# Altium PCB ZYNQ_Motherboard_final.PcbDoc (part 1 of 2)
Units mm, origin at the board's own origin, x right, y up, seen from the top; angles counter-clockwise.
Board outline 100.01 x 120 mm, 4 copper layers (Top Layer, GND, Signal03, Bottom Layer), stack 0.778 mm thick; 115 components, 152 nets, 669 pads, 267 vias.
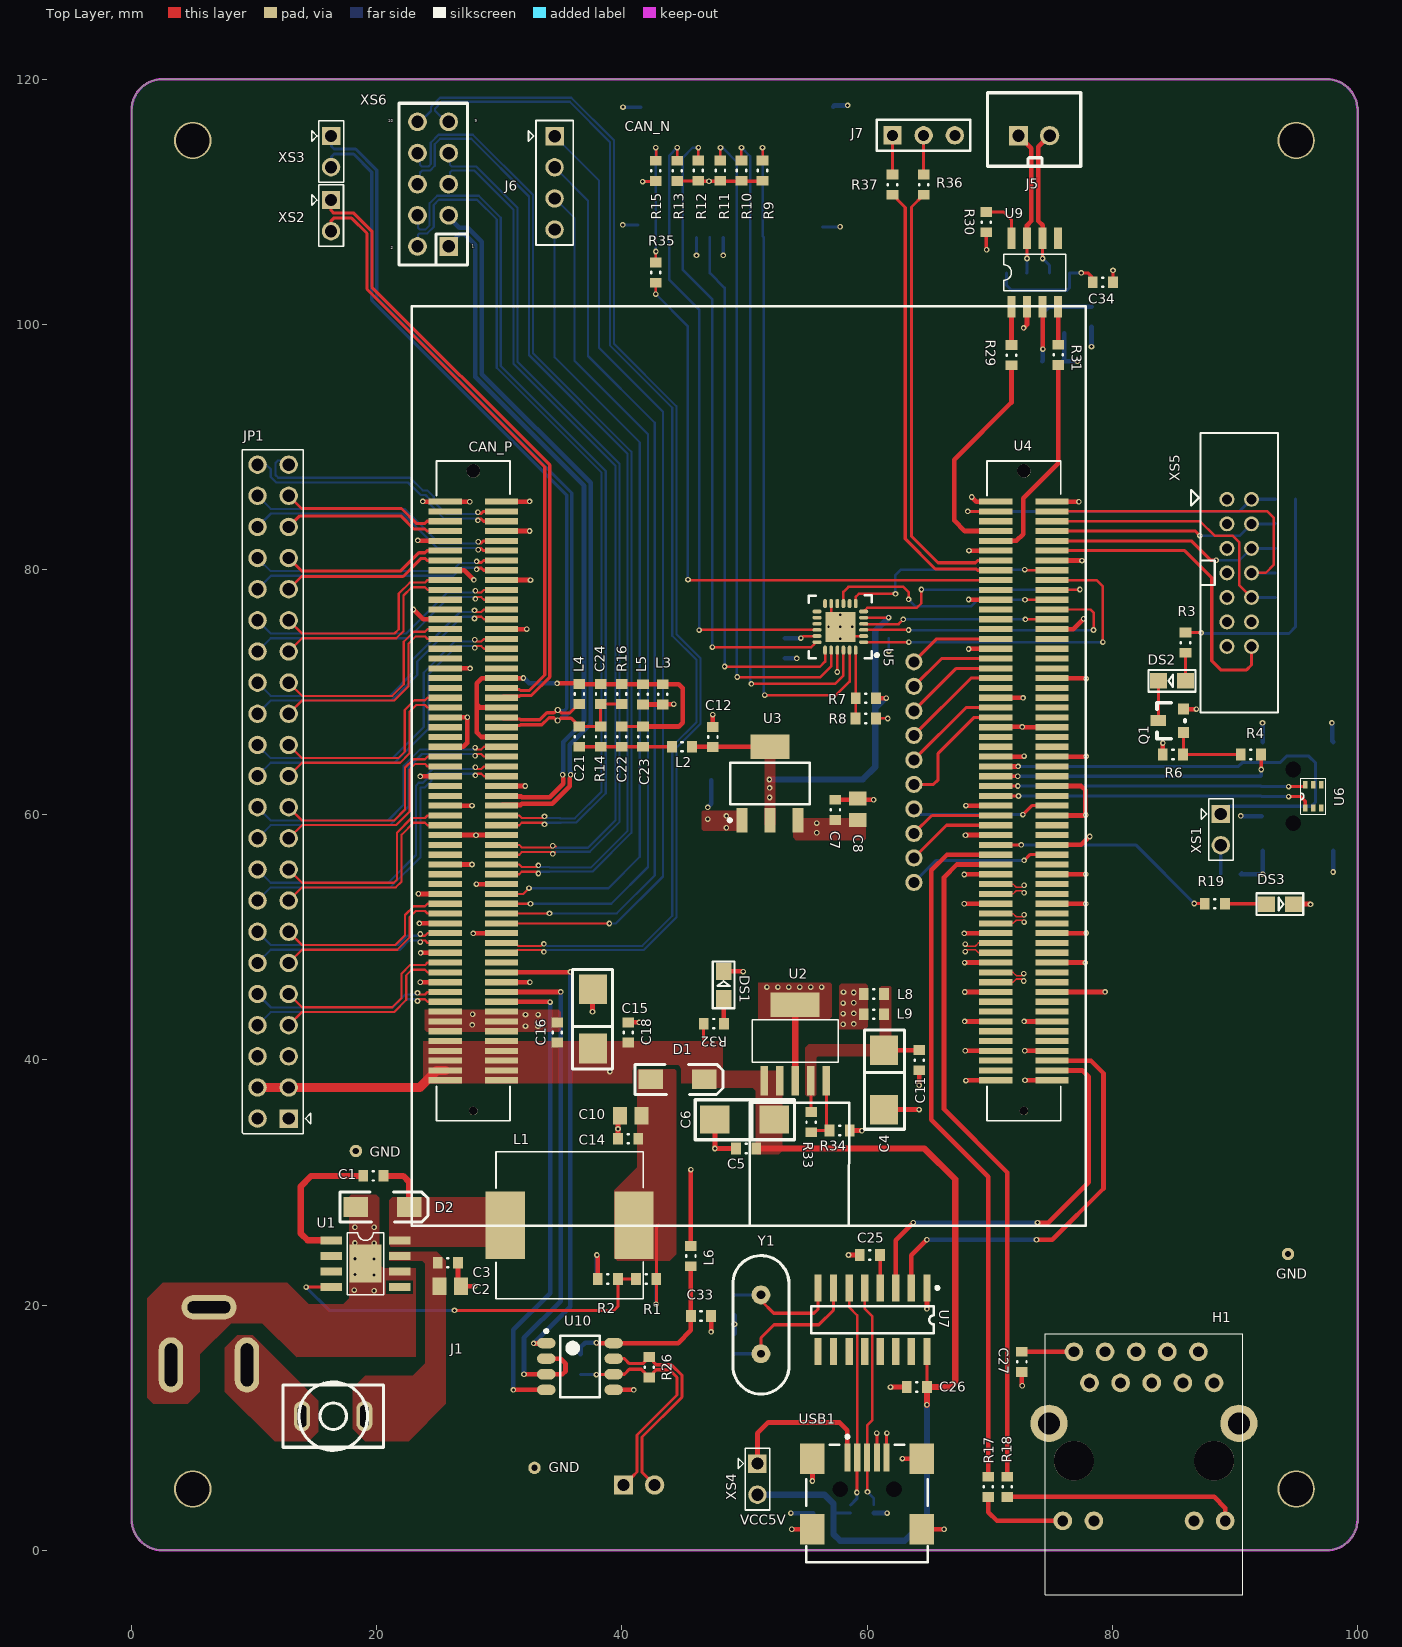
[diagram p0: Top Layer view]
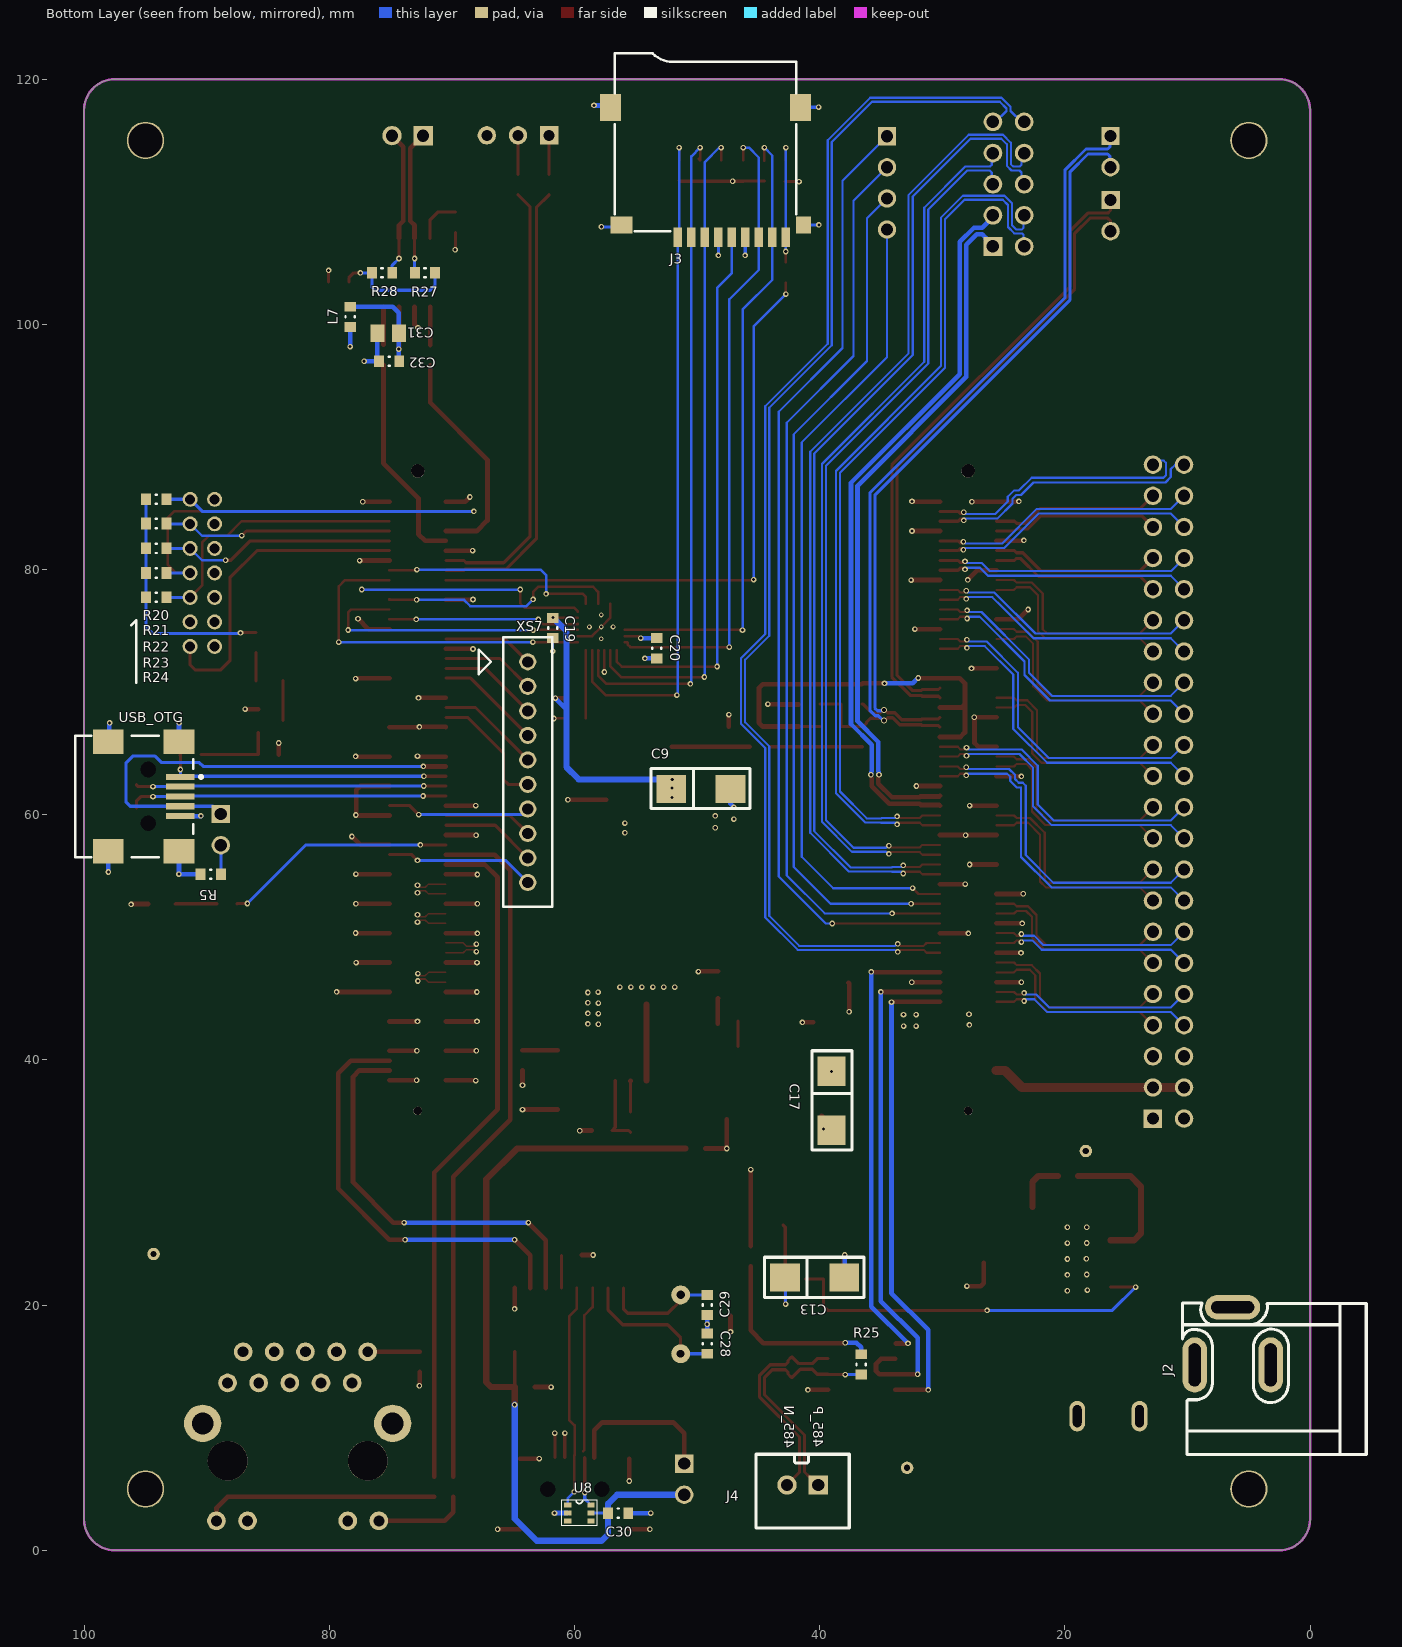
[diagram p1: Bottom Layer view, seen from below]
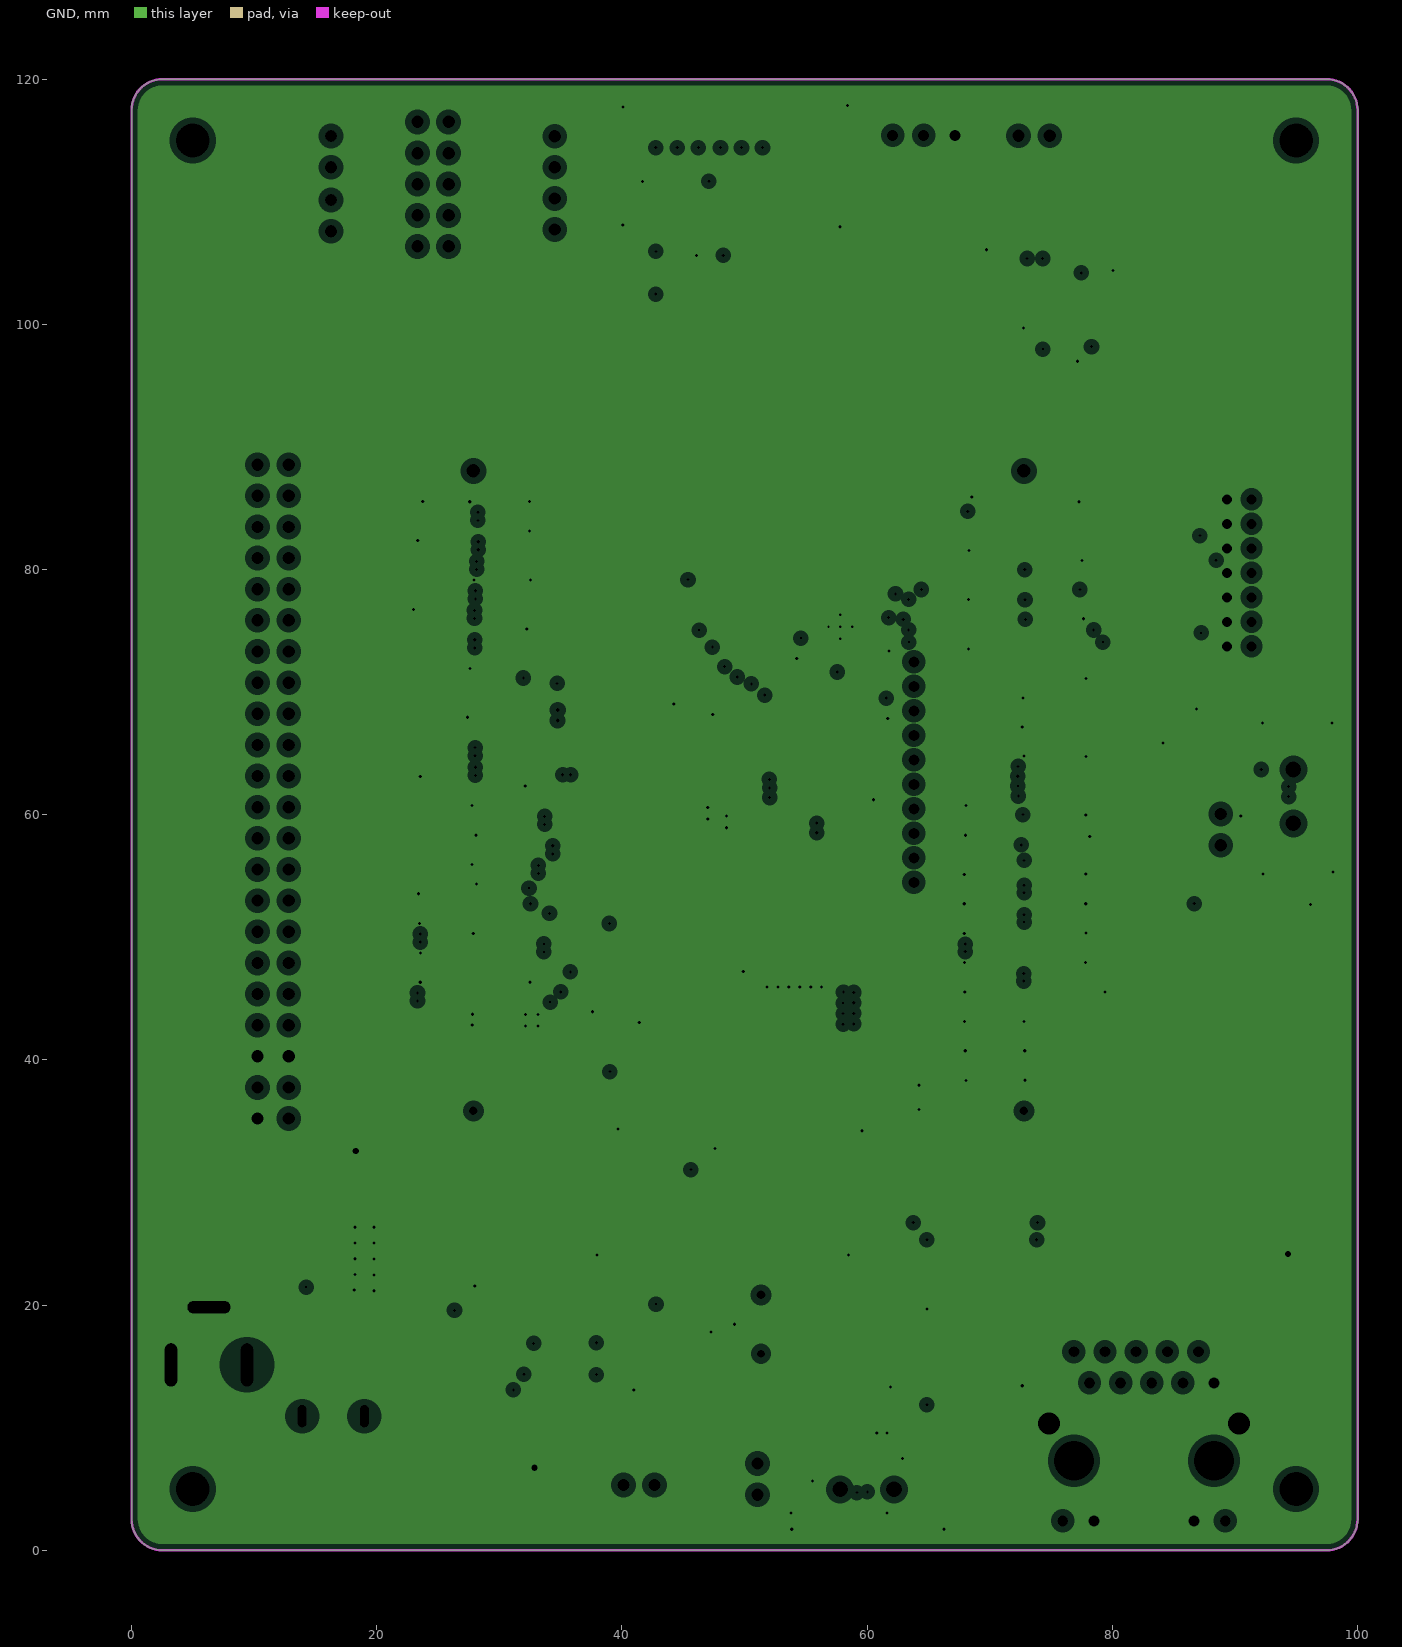
[diagram p2: GND, clearances drawn from the general rule]
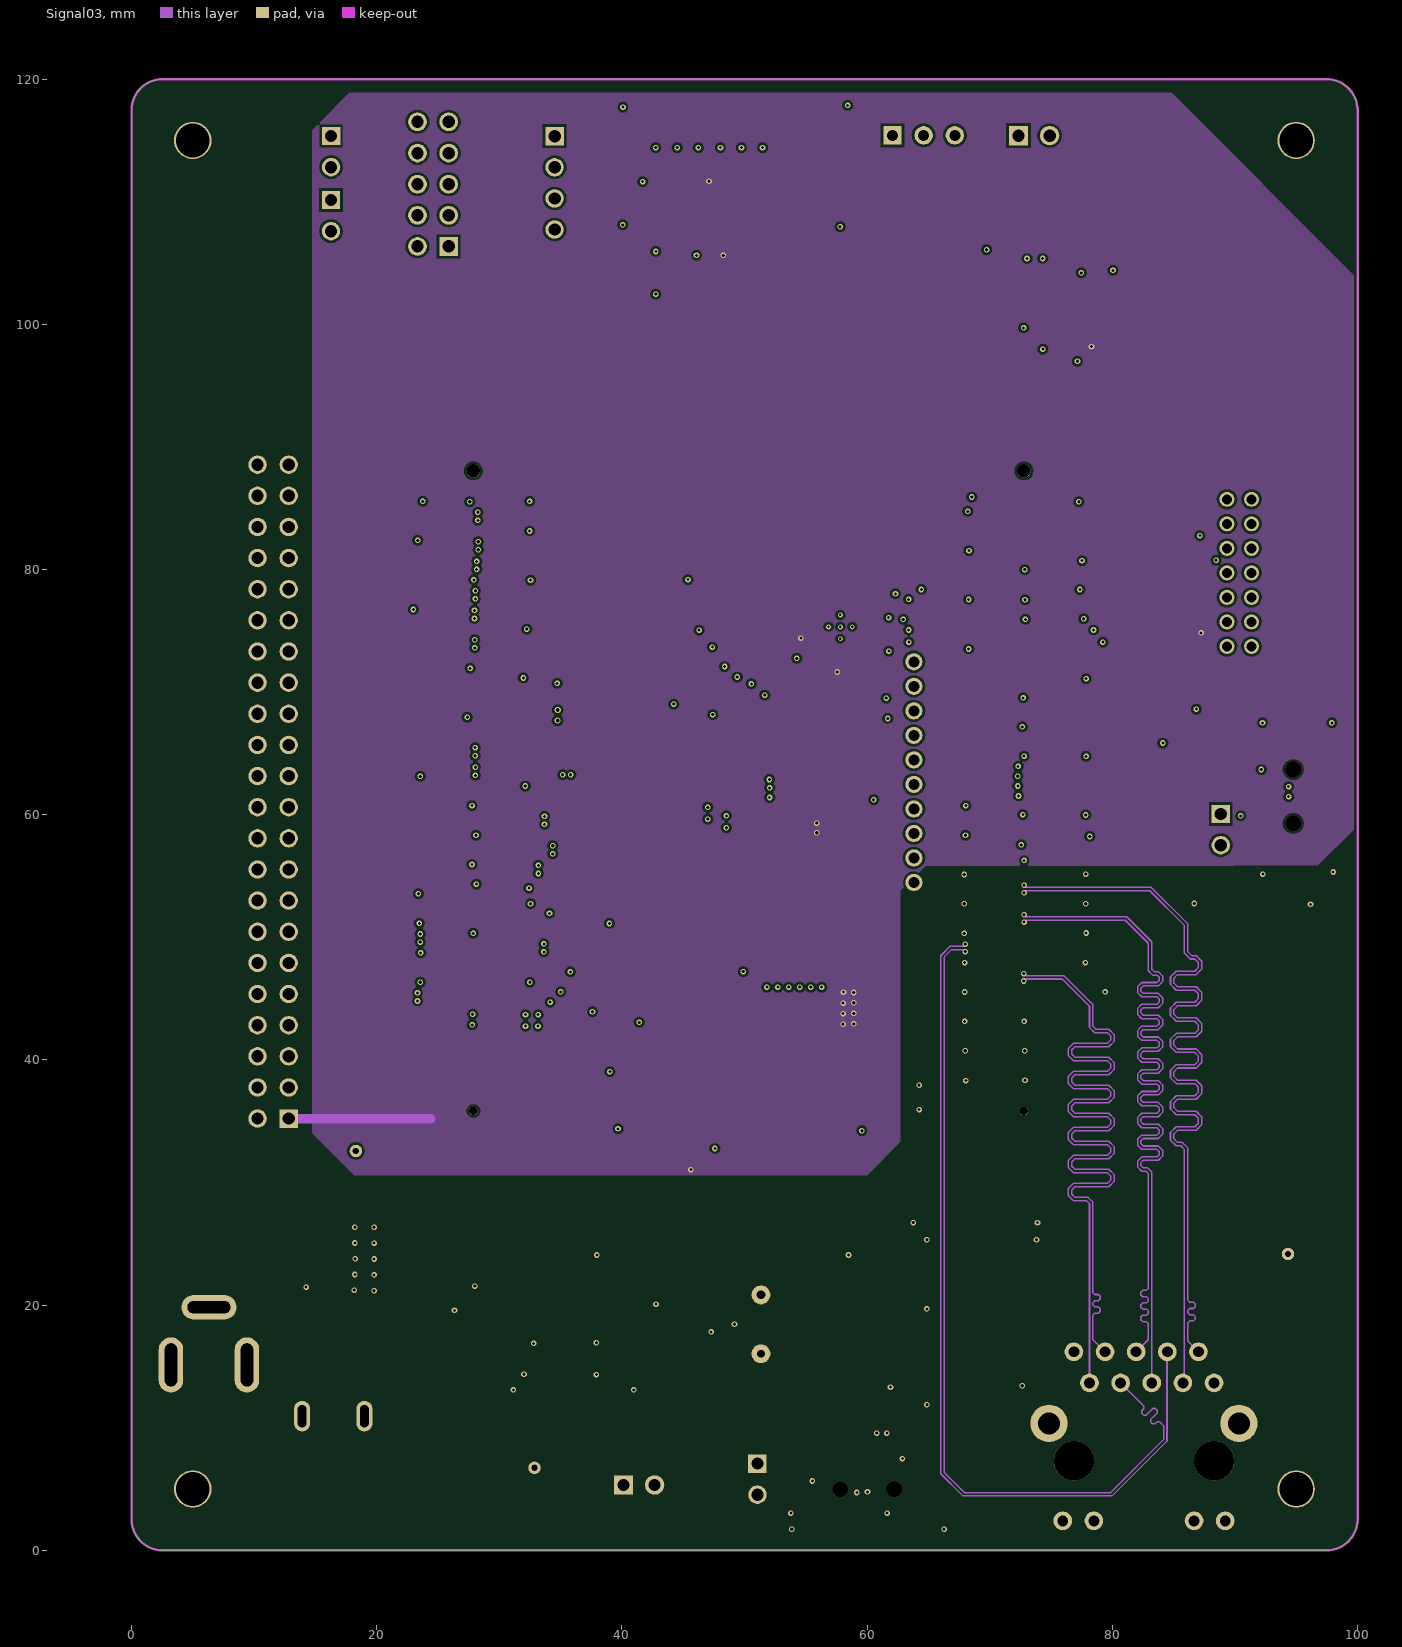
[diagram p3: Signal03]

## Layer stack, top to bottom
Top Solder: solder mask 0.0102, Solder Resist, Dk 3.5
Top Layer: signal copper 0.0356
Dielectric 1: core 0.254, FR-4, Dk 4.2
GND: plane copper 0.036, net GND
Dielectric 3: prepreg 0.127, Dk 4.2
Signal03: signal copper 0.036
Dielectric 2: core 0.254, Dk 4.2
Bottom Layer: signal copper 0.0356
Bottom Solder: solder mask 0.0102, Solder Resist, Dk 3.5

## Board outline
0.004,2.539 0.004,117.462 cw(c2.544,117.462) 2.544,120.002 97.477,120.002 cw(c97.477,117.462) 100.017,117.462 100.017,2.54 cw(c97.477,2.54) 97.477,0 91.962,0 2.544,-0.001 cw(c2.544,2.539)

## Design rules (kind name [scope] priority, off if disabled: settings)
Clearance Clearance_Diff [InNetClass('Diff_100') vs InNetClass('All Nets')] p1: gap=0.152 ignorepadtopadclearanceinfootprint=FALSE except(0: Arc-Hole Track-Hole SMDPad-Hole THPad-Hole Via-Hole Fill-Hole Poly-Hole Region-Hole Text-Hole; 0.381: Poly-Poly)
Clearance [All] p2: gap=0.203 ignorepadtopadclearanceinfootprint=FALSE except(0: Arc-Hole Track-Hole SMDPad-Hole THPad-Hole Via-Hole Fill-Hole Poly-Hole Region-Hole Text-Hole; 0.152: SMDPad-SMDPad; 0.381: Poly-Poly)
ComponentClearance [All] p1: gap=0 collisioncheckmode=3 verticalgap=0 showdistances=FALSE
DiffPairsRouting DIFF_100 [InDifferentialPairClass('100Ω')] p1: maxlimit=0.152 minlimit=0.152 mostfreqgap=0.152 toplayer_minwidth=0.127 toplayer_maxwidth=0.127 toplayer_prefwidth=0.127 midlayer1_minwidth=0.127 midlayer1_maxwidth=0.127 midlayer1_prefwidth=0.127 bottomlayer_minwidth=0.127 bottomlayer_maxwidth=0.127 bottomlayer_prefwidth=0.127 maxuncoupledlength=12.7
DiffPairsRouting [All] p2: maxlimit=0.254 minlimit=0.152 mostfreqgap=0.203 toplayer_minwidth=0.152 toplayer_maxwidth=0.381 toplayer_prefwidth=0.254 midlayer1_minwidth=0.152 midlayer1_maxwidth=0.381 midlayer1_prefwidth=0.254 bottomlayer_minwidth=0.152 bottomlayer_maxwidth=0.381 bottomlayer_prefwidth=0.254 maxuncoupledlength=12.7
HoleSize [All] p1: absolutevalues=TRUE maxlimit=25.4 minlimit=0.025 maxpercent=80.000 minpercent=20.000
MinimumSolderMaskSliver [All] p1: minsoldermaskwidth=0
PlaneClearance [All] p1: clearance=0.508
PlaneConnect [All] p1: planeconnectstyle=Direct reliefexpansion=0.508 reliefentries=4 reliefconductorwidth=0.254 reliefairgap=0.254
PolygonConnect [All] p1: connectstyle=Direct reliefconductorwidth=0.254 reliefentries=4 polygonreliefangle="90 Angle" airgapwidth=0.254
RoutingVias [All] p1: holewidth=0.254 width=0.457 viastyle="Through Hole" minholewidth=0.203 minwidth=0.406 maxholewidth=0.711 maxwidth=1.27
SilkToSilkClearance [All] p1: silktosilkclearance=0.003
SilkToSolderMaskClearance [IsPad] p1: minsilkscreentomaskgap=0 clearancetoexposedcopper=TRUE
SolderMaskExpansion [All] p1: expansion=0.102 istentingtop=FALSE
Width [All] p1: maxlimit=2.54 minlimit=0.127 preferedwidth=0.254
22 further rules are at their usual default settings.

## Classes and differential pairs
differential pair class 100Ω: ETH_TD0 ETH_TD1 ETH_TD2 ETH_TD3
net class Diff_100: ETH_TD0_N ETH_TD0_P ETH_TD1_N ETH_TD1_P ETH_TD2_N ETH_TD2_P ETH_TD3_N ETH_TD3_P
differential pair IO13_L12: +IO13_L12_P -IO13_L12_N
differential pair IO13_L15: +IO13_L15_P -IO13_L15_N
differential pair IO13_L17: +IO13_L17_P -IO13_L17_N
differential pair IO13_L19: +IO13_L19_P -IO13_L19_N
differential pair IO13_L13: +IO13_L13_P -IO13_L13_N
differential pair V0: +V0_P -V0_N
differential pair ETH_TD3: +ETH_TD3_P -ETH_TD3_N
differential pair ETH_TD2: +ETH_TD2_P -ETH_TD2_N
differential pair ETH_TD1: +ETH_TD1_P -ETH_TD1_N
differential pair ETH_TD0: +ETH_TD0_P -ETH_TD0_N
differential pair DX0: +DX0_P -DX0_N
differential pair CAN: +CAN_P -CAN_N
differential pair 485: +485_P -485_N
differential pair IO13_L11: +IO13_L11_P -IO13_L11_N
differential pair IO13_L22: +IO13_L22_P -IO13_L22_N
differential pair IO34_L1: +IO34_L1_P -IO34_L1_N
differential pair IO13_L14: +IO13_L14_P -IO13_L14_N
differential pair IO34_L2: +IO34_L2_P -IO34_L2_N
differential pair IO13_L18: +IO13_L18_P -IO13_L18_N
differential pair IO34_L10: +IO34_L10_P -IO34_L10_N
differential pair IO34_L11: +IO34_L11_P -IO34_L11_N
differential pair IO34_L9: +IO34_L9_P -IO34_L9_N
differential pair IO34_L7: +IO34_L7_P -IO34_L7_N
differential pair IO34_L21: +IO34_L21_P -IO34_L21_N
differential pair IO34_L16: +IO34_L16_P -IO34_L16_N
differential pair IO34_L12: +IO34_L12_P -IO34_L12_N
differential pair IO34_L20: +IO34_L20_P -IO34_L20_N
differential pair IO34_L8: +IO34_L8_P -IO34_L8_N
differential pair IO34_L6: +IO34_L6_P -IO34_L6_N
differential pair IO34_L5: +IO34_L5_P -IO34_L5_N
differential pair IO35_L21: +IO35_L21_P -IO35_L21_N
differential pair IO34_L24: +IO34_L24_P -IO34_L24_N

## Components (designator, comment, footprint, x,y, rotation, side; value= is the part's Value field where it differs from the comment)
C1 "10nF" 0603 20.56,30.541 r0 top
C2 "10uF" 0805 26.008,21.544 r0 top
C3 "0.1uF" 0603 26.629,23.455 r0 top
C4 "10uF/16V" shape_c 61.369,40.797 r270 top
C5 "0.1uF" 0603 49.315,32.777 r180 top
C6 "10uF/16V" shape_c 52.44,35.164 r180 top
C7 "0.1uF" 0603 57.418,59.576 r270 top
C8 "10uF" 0805 59.247,60.439 r270 top
C9 "10uF/16V" shape_c 52.129,62.104 r180 bottom
C10 "10uF" 0805 40.73,35.444 r180 top
C11 "0.1uF" 0603 64.251,40.803 r90 top
C12 "0.1uF" 0603 47.428,65.515 r270 top
C13 "22uF/25V" shape_c 42.858,22.225 r180 bottom
C14 "0.1uF" 0603 39.69,33.564 r180 top
C15 "10uF/16V" shape_c 37.642,40.911 r90 top
C16 "0.1uF" 0603 34.736,43.064 r90 top
C17 "10uF/16V" shape_c 39.039,39.095 r270 bottom
C18 "0.1uF" 0603 40.527,43.064 r90 top
C19 "0.1uF" 0603 61.787,76.058 r90 bottom
C20 "0.1uF" 0603 53.303,74.406 r90 bottom
C21 "0.1uF" 0603 36.539,67.193 r90 top
C22 "0.1uF" 0603 39.994,67.193 r90 top
C23 "10uF" 0603 41.721,67.193 r90 top
C24 "0.1uF" 0603 38.266,70.672 r90 top
C25 "0.1uF" 0603 61.05,24.087 r0 top
C26 "0.1uF" 0603 63.235,13.317 r180 top
C27 "0.1uF" 0603 72.633,14.544 r270 top
C28 "22pF" 0603 49.188,16.036 r270 bottom
C29 "22pF" 0603 49.188,20.836 r90 bottom
C30 "0.1uF" 0603 57.265,3.037 r0 bottom
C31 "47uF" 0805 75.21,99.275 r0 bottom
C32 "0.1uF" 0603 75.945,96.989 r0 bottom
C33 "0.1uF" 0603 47.282,19.111 r0 top
C34 "0.1uF" 0603 80.06,103.44 r0 top
D1 "B340A" "SMA (DO-214AC)" 44.515,38.415 r0 top
D2 "B340A" "SMA (DO-214AC)" 20.458,28.001 r0 top
DS1 "LED Red" SMDLED 48.298,45.018 r90 top
DS2 "LED Blue" SMDLED 85.981,70.926 r180 top
DS3 "LED Blue" SMDLED 92.568,52.716 r0 top
H1 "HY911130A" RJ45_1000M 82.589,7.304 r0 top
J1 "KCD5/11" SW-TH_L8.0-W5.11-P5.08_TP11SH8CQE 16.459,10.943 r0 top
J2 "DC005" DC005 9.423,15.126 r0 bottom
J3 "SDCARD-M" SDCARD-M 49.324,118.105 r90 bottom
J4 "CON2" 白色插座2 40.132,5.334 r0 bottom
J5 "CON2" 白色插座2 72.354,115.392 r0 top
J6 "Header1X4" 1X4_2.54 34.517,115.353 r270 top
J7 "Header 3" HDR1X3 62.078,115.418 r0 top
JP1 "HEADER 22X2" 2x22_2.54 12.826,35.215 r90 top
L1 "15uH" L-SMD-12x12x10 35.733,26.528 r90 top
L2 "MPZ1608B471ATA00" 0603 44.084,65.543 r180 top
L3 "MPZ1608B471ATA00" 0603 43.346,70.648 r90 top
L4 "MPZ1608B471ATA00" 0603 36.539,70.672 r90 top
L5 "MPZ1608B471ATA00" 0603 41.721,70.647 r90 top
L6 "MPZ1608B471ATA00" 0603 45.632,24.825 r90 top
L7 "MPZ1608B471ATA00" 0603 78.308,101.433 r90 bottom
L8 "MPZ1608B471ATA00" 0603 59.729,43.724 r180 top
L9 "MPZ1608B471ATA00" 0603 59.729,45.375 r180 top
Q1 "2N2222" SOT-23 84.405,68.235 r90 top
R1 "10K,1%" 0603 41.162,22.134 r180 top
R2 "2.8K,1%" 0603 38.038,22.134 r180 top
R3 "330R" 0603 85.98,73.213 r270 top
R4 "10K" 0603 90.478,64.908 r180 top
R5 "0R" 0603 88.853,55.154 r180 bottom
R6 "100K" 0603 84.127,64.908 r180 top
R7 "NC" 0603 59.074,69.505 r180 top
R8 "4.7K" 0603 59.07,67.854 r180 top
R9 "10K" 0603 51.474,113.371 r90 top
R10 "10K" 0603 49.757,113.371 r90 top
R11 "10K" 0603 48.04,113.371 r90 top
R12 "10K" 0603 46.242,113.371 r90 top
R13 "10K" 0603 44.515,113.344 r90 top
R14 "3K" 0603 38.266,67.193 r90 top
R15 "NC/0R" 0603 42.774,113.344 r90 top
R16 "1K" 0603 39.994,70.672 r90 top
R17 "1K" 0603 69.889,4.359 r270 top
R18 "1K" 0603 71.439,4.359 r270 top
R19 "1K" 0603 89.19,52.741 r0 top
R20 "R" 0603 94.946,85.736 r0 bottom
R21 "R" 0603 94.946,83.754 r0 bottom
R22 "R" 0603 94.946,81.722 r0 bottom
R23 "R" 0603 94.946,79.716 r0 bottom
R24 "R" 0603 94.946,77.735 r0 bottom
R25 "Res2" 0603 36.629,15.986 r90 bottom
R26 "Res2" 0603 42.242,14.109 r270 top
R27 "50R" 0603 71.374,104.202 r180 bottom
R28 "50R" 0603 74.879,104.202 r180 bottom
R29 "0R" 0603 71.781,98.309 r90 top
R30 "Res2" 0603 69.723,109.155 r90 top
R31 "0R" 0603 75.591,98.334 r90 top
R32 "2K" 0603 48.325,42.962 r0 top
R33 "10K,1%" 0603 55.437,34.097 r270 top
R34 "5.76K,1%" 0603 58.586,34.25 r0 top
R35 "33R" 0603 42.774,103.397 r270 top
R36 "33R" 0603 64.618,112.217 r90 top
R37 "33R" 0603 62.078,112.217 r90 top
U1 "TPS5430DDA" SOIC8-PAD 19.087,23.379 r0 top
U2 "TPS7A4501DCQR" SOT223-6 51.601,38.314 r0 top
U3 "AMS1117-1.8" SOT-223 52.084,62.547 r90 top
U4 "ZYNQ_VD" ZYNQ_VD 50.394,64.091 r90 top locked
U5 "TXS02612RTWR" WQFN24_PAD 57.824,75.326 r180 top
U6 "NUP4202W1" SOT-363 95.747,60.544 r90 top
U7 "CH340G" SOP16M 60.441,18.804 r180 top
U8 "NUP4202W1" SOT-363 60.563,3.697 r180 bottom
U9 "SN65HVD232DR" SOIC8 73.686,104.228 r90 top
U10 "MAX3485ESE" SOP8 37.264,14.362 r0 top
USB1 "USB" USB/SM0.8-6H5 59.999,-0.283 r270 top
USB_OTG "USB" USB/SM0.8-6H5 100.021,61.488 r0 bottom
XS1 "Header 2" 1X2_2.54 88.853,60.056 r270 top
XS2 "Header 2" 1X2_2.54 16.284,115.363 r270 top
XS3 "Header 2" 1X2_2.54 16.279,110.14 r270 top
XS4 "Jumper" 1X2_2.54 51.059,7.076 r270 top
XS5 "XILINX_JTAG" JTAG14-2.0 90.358,79.728 r270 top
XS6 "Header" JTAG_10 25.864,106.361 r180 top
XS7 "Header" 1x9_2.0 63.819,72.477 r270 bottom
Y1 "12M" 晶振 51.347,16.035 r90 top

## Footprints (in the part's own frame and the unit in brackets; to place one, negate y for a bottom-side part, rotate by r counter-clockwise, add the part's x,y. Pads: shape width x height; smd on the part's side, far side on the other; paste and mask are expansions set on the pad)
1X2_2.54 [mm]
  rect 1.5x1.5 hole 1: 1(0,0)
  round 1.5 hole 1: 2(2.54,0)
  silkscreen extent -1.24,-1.57 3.78,1.02
1X4_2.54 [mm]
  rect 1.5x1.5 hole 1: 1(0,0)
  round 1.5 hole 1: 2(2.54,0) 3(5.08,0) 4(7.62,0)
  silkscreen extent -1.27,-2.13 8.89,1.52
1x9_2.0 [mm]
  round 1.4 hole 0.9: 1(0,0) 2(2,0) 3(4,0) 4(6,0) 5(8,0) 6(10,0) 7(12,0) 8(14,0) 9(16,0) 10(18,0)
  silkscreen extent -2,-4 20,2
2x22_2.54 [mm]
  rect 1.5x1.5 hole 1: 1(0,0)
  round 1.5 hole 1: 2(0,2.54) 3(2.54,0) 4(2.54,2.54) 5(5.08,0) 6(5.08,2.54) 7(7.62,0) 8(7.62,2.54) 9(10.16,0) 10(10.16,2.54) 11(12.7,0) 12(12.7,2.54) 13(15.24,0) 14(15.24,2.54) 15(17.78,0) 16(17.78,2.54) 17(20.32,0) 18(20.32,2.54) 19(22.86,0) 20(22.86,2.54) 21(25.4,0) 22(25.4,2.54) 23(27.94,0) 24(27.94,2.54) 25(30.48,0) 26(30.48,2.54) 27(33.02,0) 28(33.02,2.54) 29(35.56,0) 30(35.56,2.54) 31(38.1,0) 32(38.1,2.54) 33(40.64,0) 34(40.64,2.54) 35(43.18,0) 36(43.18,2.54) 37(45.72,0) 38(45.72,2.54) 39(48.26,0) 40(48.26,2.54) 41(50.8,0) 42(50.8,2.54) 43(53.34,0) 44(53.34,2.54)
  silkscreen extent -1.22,-1.8 54.56,3.78
0603 [mm]
  rect 0.8x0.95 smd: 1(-1.65,0) 2(0,0)
  silkscreen extent -0.87,-0.38 -0.77,0.38, body extent -1.62,-0.4 -0.02,0.4, height 0.5
0805 [mm] "Chip Capacitor, 2-Leads, Body 2.00x1.27mm, IPC Medium Density"
  rect 1.15x1.4 smd: 1(-0.875,0) 2(0.875,0)
  body extent -1,-0.64 1,0.64, height 1.25
DC005 [mm]
  oval 2x4.5 hole 3.5 slot 1 at 0 deg: 1(0,0) 2(-6.2,0)
  oval 4.5x2 hole 3.5 slot 1 at 90 deg: 3(-3.1,-4.7)
  silkscreen extent -14,-5.05 1,7.31, body extent -13.82,-4.97 0.66,7.4, height 9
HDR1X3 [mm] "Connector; Header; 3 Position"
  rect 1.5x1.5 hole 0.9: 1(0,0)
  round 1.5 hole 0.9: 2(2.54,0) 3(5.08,0)
  silkscreen extent -1.27,-1.27 6.35,1.27
JTAG14-2.0 [mil]
  round 48 hole 32: 1(-236.22,-39.37) 2(-236.22,39.37) 3(-157.48,-39.37) 4(-157.48,39.37) 5(-78.74,-39.37) 6(-78.74,39.37) 7(0,-39.37) 8(0,39.37) 9(78.74,-39.37) 10(78.74,39.37) 11(157.48,-39.37) 12(157.48,39.37) 13(236.22,-39.37) 14(236.22,39.37)
  silkscreen extent -449,-154 449,124
JTAG_10 [mil]
  rect 60x60 hole 40: 1(-0.35,0.3)
  round 60 hole 40: 2(99.65,0.3) 3(-0.35,-99.7) 4(99.65,-99.7) 5(-0.35,-199.7) 6(99.65,-199.7) 7(-0.35,-299.7) 8(99.65,-299.7) 9(-0.35,-399.7) 10(99.65,-399.7)
  silkscreen extent -60,-460 160,60
L-SMD-12x12x10 [mm]
  rect 5.5x3.2 smd: 1(0,5.25) 2(0,-5.25)
  silkscreen extent -6,-6 6,6
RJ45_1000M [mil] "HY911130A"
  round 60 hole 35: 1(-225,350) 2(-175,250) 3(-125,350) 4(-75,250) 5(-25,350) 6(25,250) 7(75,350) 8(125,250) 9(175,350) 10(225,250) 11(-260.83,-192.91) 12(-160.83,-192.91) 13(160.83,-192.91) 14(260.83,-192.91)
  round 120 hole 70: 15(-304.92,120.08) 16(304.92,120.08)
  round 128 hole 128: " "(-225,0) " "(225,0)
  silkscreen extent -317,-430 317,409
SDCARD-M [mm] "TF卡"
  rect 1.6x0.7 smd: 1(-11.008,2.25) 2(-11.008,1.15) 3(-11.008,0.05) 4(-11.008,-1.05) 5(-11.008,-2.15) 6(-11.008,-3.25) 7(-11.008,-4.35) 8(-11.008,-5.45) 9(-11.008,-6.55)
  rect 1.4x1.2 smd: 10(-10,-8.004)
  rect 2.2x1.7 smd: 11(-0.4,-7.75) 13(-0.4,7.75)
  rect 1.4x1.8 smd: 12(-10,6.85)
  silkscreen extent -10.5,-7.4 4,7.4
shape_c [mil]
  rect 95x90 smd: 1(0.76,0.43) 2(190.76,0.43)
  silkscreen extent -65,-63 254,66
"SMA (DO-214AC)" [mm]
  rect 2x1.6 smd: 1(-2.15,0) 2(2.2,0)
  silkscreen extent -3.44,-1.23 3.73,1.22, body extent -2.74,-1.4 2.74,1.4, height 2.44
SMDLED [mm]
  rect 1.4x1.27 smd: 1(0.001,-0.002) 2(2.211,-0.002)
  silkscreen extent -0.8,-0.89 3.01,0.89
SOIC8 [mm]
  rect 1.75x0.65 smd: 1(-2.794,1.905) 2(-2.794,0.635) 3(-2.794,-0.635) 4(-2.794,-1.905) 5(2.794,-1.905) 6(2.794,-0.635) 7(2.794,0.635) 8(2.794,1.905)
  silkscreen extent -1.48,-2.54 1.48,2.54
SOIC8-PAD [mm]
  rect 1.75x0.65 smd: 1(-2.794,1.905) 2(-2.794,0.635) 3(-2.794,-0.635) 4(-2.794,-1.905) 5(2.794,-1.905) 6(2.794,-0.635) 7(2.794,0.635) 8(2.794,1.905)
  rect 2.6x3.1 smd: 9(0,0)
  silkscreen extent -1.48,-2.54 1.48,2.54
SOP8 [mm]
  oval 1.5x0.85 smd: 1(-3.429,2.54) 2(-3.429,1.27) 3(-3.429,0) 4(-3.429,-1.27) 5(2.071,-1.27) 6(2.071,0) 7(2.071,1.27) 8(2.071,2.54)
  silkscreen extent -3.55,-1.87 0.92,3.64, body extent -2.68,-1.87 1.32,3.14, height 2.65
SOP16M [mm]
  rect 0.6x2.2 smd: 1(-4.445,-2.6) 2(-3.175,-2.6) 3(-1.905,-2.6) 4(-0.635,-2.6) 5(0.635,-2.6) 6(1.905,-2.6) 7(3.175,-2.6) 8(4.445,-2.6) 9(4.445,2.6) 10(3.175,2.6) 11(1.905,2.6) 12(0.635,2.6) 13(-0.635,2.6) 14(-1.905,2.6) 15(-3.175,2.6) 16(-4.445,2.6)
  silkscreen extent -5.42,-2.72 5,1.1
SOT223-6 [mm]
  rect 0.6x2.4 smd: 1(0,0) 2(1.27,0) 3(2.54,0) 4(3.81,0) 5(5.08,0)
  rect 4x2 smd: 6(2.54,6.2)
  silkscreen extent -0.96,1.49 6.04,4.96
SOT-23 [mil]
  rect 36x36 smd: 1(-60,-55) 2(15,-55)
  rect 36x50 smd: 3(-22,25)
  silkscreen extent -80,-60 35,30
SOT-223 [mm] "SOT223, 4-Leads, Body 6.40x7.00mm (avg), Pitch 2.28mm, IPC Medium Density"
  rect 2x0.9 smd: 1(-3,2.28) 2(-3,0) 3(-3,-2.28)
  rect 2x3.15 smd: 4(3,0)
  silkscreen extent -3.12,-3.25 1.7,3.4, body extent -1.78,-3.22 1.78,3.22, height 1.65
SOT-363 [mm]
  rect 0.6x0.4 smd: 1(0,0) 2(0,-0.65) 3(0,-1.3) 4(1.9,-1.3) 5(1.9,-0.65) 6(1.9,0)
  silkscreen extent -0.51,-1.68 2.41,0.38
SW-TH_L8.0-W5.11-P5.08_TP11SH8CQE [mm]
  oval 1.3x2.5 hole 0.7 slot 1.8 at 90 deg: 1(-2.54,0) 3(2.54,0)
  silkscreen extent -4.1,-2.79 4.1,2.79
USB/SM0.8-6H5 [mm]
  rect 2.3x0.5 smd: 1(-7.85,-1.6) 2(-7.85,-0.8) 3(-7.85,0) 4(-7.85,0.8) 5(-7.85,1.6)
  rect 2.5x2 smd: 6(-7.75,4.45) 7(-1.996,4.45) 8(-7.75,-4.45) 9(-1.996,-4.45)
  round 0.6 hole 1.27 unplated: MH1(-5.25,2.2) MH2(-5.25,-2.2)
  silkscreen extent -9.67,-4.95 0.7,4.95
WQFN24_PAD [mm] "QFN, 36-Leads, Body 6x6mm, Pitch 0.5mm, ST Recommended"
  oval 0.75x0.3 smd: 1(-1.9,1.25) 2(-1.9,0.75) 3(-1.9,0.25) 4(-1.9,-0.25) 5(-1.9,-0.75) 6(-1.9,-1.25) 13(1.9,-1.25) 14(1.9,-0.75) 15(1.9,-0.25) 16(1.9,0.25) 17(1.9,0.75) 18(1.9,1.25)
  oval 0.3x0.75 smd: 7(-1.25,-1.9) 8(-0.75,-1.9) 9(-0.25,-1.9) 10(0.25,-1.9) 11(0.75,-1.9) 12(1.25,-1.9) 19(1.25,1.9) 20(0.75,1.9) 21(0.25,1.9) 22(-0.25,1.9) 23(-0.75,1.9) 24(-1.25,1.9)
  rect 2.45x2.45 smd: 25(0,0)
  silkscreen extent -3.1,-2.57 2.58,2.57, body extent -2.69,-2.69 2.69,2.67, height 1
ZYNQ_VD [mm] "SE2625_VD"
  round 0.7 hole 0.7 unplated: " "(-28.25,-22.405) " "(-28.25,22.503)
  round 1.1 hole 1.1 unplated: " "(23.95,-22.405) " "(23.95,22.503)
  rect 0.5x2.7 smd: A1(-25.75,24.803) A2(-25.75,20.203) A3(-24.95,24.803) A4(-24.95,20.203) A5(-24.15,24.803) A6(-24.15,20.203) A7(-23.35,24.803) A8(-23.35,20.203) A9(-22.55,24.803) A10(-22.55,20.203) A11(-21.75,24.803) A12(-21.75,20.203) A13(-20.95,24.803) A14(-20.95,20.203) A15(-20.15,24.803) A16(-20.15,20.203) A17(-19.35,24.803) A18(-19.35,20.203) A19(-18.55,24.803) A20(-18.55,20.203) A21(-17.75,24.803) A22(-17.75,20.203) A23(-16.95,24.803) A24(-16.95,20.203) A25(-16.15,24.803) A26(-16.15,20.203) A27(-15.35,24.803) A28(-15.35,20.203) A29(-14.55,24.803) A30(-14.55,20.203) A31(-13.75,24.803) A32(-13.75,20.203) A33(-12.95,24.803) A34(-12.95,20.203) A35(-12.15,24.803) A36(-12.15,20.203) A37(-11.35,24.803) A38(-11.35,20.203) A39(-10.55,24.803) A40(-10.55,20.203) A41(-9.75,24.803) A42(-9.75,20.203) A43(-8.95,24.803) A44(-8.95,20.203) A45(-8.15,24.803) A46(-8.15,20.203) A47(-7.35,24.803) A48(-7.35,20.203) A49(-6.55,24.803) A50(-6.55,20.203) A51(-5.75,24.803) A52(-5.75,20.203) A53(-4.95,24.803) A54(-4.95,20.203) A55(-4.15,24.803) A56(-4.15,20.203) A57(-3.35,24.803) A58(-3.35,20.203) A59(-2.55,24.803) A60(-2.55,20.203) A61(-1.75,24.803) A62(-1.75,20.203) A63(-0.95,24.803) A64(-0.95,20.203) A65(-0.15,24.803) A66(-0.15,20.203) A67(0.65,24.803) A68(0.65,20.203) A69(1.45,24.803) A70(1.45,20.203) A71(2.25,24.803) A72(2.25,20.203) A73(3.05,24.803) A74(3.05,20.203) A75(3.85,24.803) A76(3.85,20.203) A77(4.65,24.803) A78(4.65,20.203) A79(5.45,24.803) A80(5.45,20.203) A81(6.25,24.803) A82(6.25,20.203) A83(7.05,24.803) A84(7.05,20.203) A85(7.85,24.803) A86(7.85,20.203) A87(8.65,24.803) A88(8.65,20.203) A89(9.45,24.803) A90(9.45,20.203) A91(10.25,24.803) A92(10.25,20.203) A93(11.05,24.803) A94(11.05,20.203) A95(11.85,24.803) A96(11.85,20.203) A97(12.65,24.803) A98(12.65,20.203) A99(13.45,24.803) A100(13.45,20.203) A101(14.25,24.803) A102(14.25,20.203) A103(15.05,24.803) A104(15.05,20.203) A105(15.85,24.803) A106(15.85,20.203) A107(16.65,24.803) A108(16.65,20.203) A109(17.45,24.803) A110(17.45,20.203) A111(18.25,24.803) A112(18.25,20.203) A113(19.05,24.803) A114(19.05,20.203) A115(19.85,24.803) A116(19.85,20.203) A117(20.65,24.803) A118(20.65,20.203) A119(21.45,24.803) A120(21.45,20.203) B1(-25.75,-20.105) B2(-25.75,-24.704) B3(-24.95,-20.105) B4(-24.95,-24.704) B5(-24.15,-20.105) B6(-24.15,-24.704) B7(-23.35,-20.105) B8(-23.35,-24.704) B9(-22.55,-20.105) B10(-22.55,-24.704) B11(-21.75,-20.105) B12(-21.75,-24.704) B13(-20.95,-20.105) B14(-20.95,-24.704) B15(-20.15,-20.105) B16(-20.15,-24.704) B17(-19.35,-20.105) B18(-19.35,-24.704) B19(-18.55,-20.105) B20(-18.55,-24.704) B21(-17.75,-20.105) B22(-17.75,-24.704) B23(-16.95,-20.105) B24(-16.95,-24.704) B25(-16.15,-20.105) B26(-16.15,-24.704) B27(-15.35,-20.105) B28(-15.35,-24.704) B29(-14.55,-20.105) B30(-14.55,-24.704) B31(-13.75,-20.105) B32(-13.75,-24.704) B33(-12.95,-20.105) B34(-12.95,-24.704) B35(-12.15,-20.105) B36(-12.15,-24.704) B37(-11.35,-20.105) B38(-11.35,-24.704) B39(-10.55,-20.105) B40(-10.55,-24.704) B41(-9.75,-20.105) B42(-9.75,-24.704) B43(-8.95,-20.105) B44(-8.95,-24.704) B45(-8.15,-20.105) B46(-8.15,-24.704) B47(-7.35,-20.105) B48(-7.35,-24.704) B49(-6.55,-20.105) B50(-6.55,-24.704) B51(-5.75,-20.105) B52(-5.75,-24.704) B53(-4.95,-20.105) B54(-4.95,-24.704) B55(-4.15,-20.105) B56(-4.15,-24.704) B57(-3.35,-20.105) B58(-3.35,-24.704) B59(-2.55,-20.105) B60(-2.55,-24.704) B61(-1.75,-20.105) B62(-1.75,-24.704) B63(-0.95,-20.105) B64(-0.95,-24.704) B65(-0.15,-20.105) B66(-0.15,-24.704) B67(0.65,-20.105) B68(0.65,-24.704) B69(1.45,-20.105) B70(1.45,-24.704) B71(2.25,-20.105) B72(2.25,-24.704) B73(3.05,-20.105) B74(3.05,-24.704) B75(3.85,-20.105) B76(3.85,-24.704) B77(4.65,-20.105) B78(4.65,-24.704) B79(5.45,-20.105) B80(5.45,-24.704) B81(6.25,-20.105) B82(6.25,-24.704) B83(7.05,-20.105) B84(7.05,-24.704) B85(7.85,-20.105) B86(7.85,-24.704) B87(8.65,-20.105) B88(8.65,-24.704) B89(9.45,-20.105) B90(9.45,-24.704) B91(10.25,-20.105) B92(10.25,-24.704) B93(11.05,-20.105) B94(11.05,-24.704) B95(11.85,-20.105) B96(11.85,-24.704) B97(12.65,-20.105) B98(12.65,-24.704) B99(13.45,-20.105) B100(13.45,-24.704) B101(14.25,-20.105) B102(14.25,-24.704) B103(15.05,-20.105) B104(15.05,-24.704) B105(15.85,-20.105) B106(15.85,-24.704) B107(16.65,-20.105) B108(16.65,-24.704) B109(17.45,-20.105) B110(17.45,-24.704) B111(18.25,-20.105) B112(18.25,-24.704) B113(19.05,-20.105) B114(19.05,-24.704) B115(19.85,-20.105) B116(19.85,-24.704) B117(20.65,-20.105) B118(20.65,-24.704) B119(21.45,-20.105) B120(21.45,-24.704)
  silkscreen extent -37.6,-27.45 37.4,27.55
晶振 [mm]
  round 1.54 hole 0.65: 1(0,0)
  round 1.54 hole 0.7: 2(4.8,0)
  silkscreen extent -3.29,-2.29 8,2.29, body extent -3.77,-2.54 8.13,2.54, height 3
白色插座2 [mm]
  rect 1.575x1.575 hole 1: 1(0,0)
  round 1.575 hole 1: 2(2.54,0)
  silkscreen extent -2.54,-2.5 5.08,3.5

## Part data
C1 C2 C3 C5 C7 C8 C10 C11 C12 C14 C16 C18 C19 C20 C21 C22 C23 C24 C25 C26 C27 C28 C29 C30 C31 C32 C33 C34: library part "0603-CAP-50V 100±5%"
C4 C6 C9 C13 C15 C17: library part "Cap Pol1", "Polarized Capacitor (Radial)"
D1 D2: library part SMD_整流二极管_FSL14
DS1 DS2 DS3: library part 0805_发光二极管_红色
J1: library part SW-PB, "Switch"
J2: library part CON-SOCJ-2155, "Connector"
J3: library part DM3CS-SF
J4 J5 XS4: library part "Header 2", "Header, 2-Pin"
J6: library part "Header 4", "Header, 4-Pin"
J7: "Header, 3-Pin"
JP1: library part "Header 22X2", "Header, 22-Pin, Dual row"
L1 L2 L3 L4 L5 L6 L7 L8 L9: library part Inductor, "Inductor"
Q1: library part "NPN_三极管_S9013 SOT-23"
R1 R2 R3 R4 R5 R6 R7 R8 R9 R10 R11 R12 R13 R14 R15 R16 R17 R18 R19 R20 R21 R22 R23 R24 R27 R28 R29 R31 R32 R33 R34 R35 R36 R37: library part Res2, "Resistor"
R25 R26 R30: "Resistor"
U1: library part TPS5430DDAR
U4: library part ZYNQ
U6 U8: library part NUP4202W1T2G
USB1 USB_OTG: library part USB-micro
XS1 XS2 XS3: "Header, 2-Pin"
XS6 XS7: library part "Header 10", "Header, 10-Pin"
Y1: library part "晶振(DIP 3)_4MHz"

## Free pads (board coordinates)
  round 1.016 hole 0.508: 2(18.302,32.573) 2(32.875,6.73) 2(94.336,24.17)
  round 3.048 hole 2.75: ""(5,5) ""(5,115) ""(95,5) ""(95,115)

## Via types
v1: diameter 0.457, hole 0.254, Top Layer to Bottom Layer, tented both sides, 260 vias
v2: diameter 0.4, hole 0.2, Top Layer to Bottom Layer, tented top, 4 vias
v3: diameter 0.5, hole 0.3, Top Layer to Bottom Layer, tented both sides, 2 vias
v4: diameter 0.4, hole 0.2, Top Layer to Bottom Layer, 1 vias

## Nets (pads, with @x,y where several pads share a name; then routed paths per layer and width w, separated by ;. In a path a pad name is that pad's centre, name@x,y a point inside that pad or via, vN(x,y) a via of type N, cw(c..) or ccw(c..) an arc to the next point about the centre after c; other vN are vias at no path point)
485_N: J4.2 R26.1 U10.7 | length 17.4
  Top Layer w0.254: U10.7@39.335,15.632 40.212,15.632 40.618,15.225 41.709,15.225 R26.1@42.242,15.759 42.317,15.759 42.59,15.486 42.59,15.345 42.798,15.137 44.044,15.137 44.904,14.276 44.904,12.495 41.648,9.239 41.648,6.358 J4.2@42.672,5.334
485_P: J4.1 R25.1 R26.2 U10.6 | length 19.5
  Top Layer w0.254: v1(37.924,14.336) 39.309,14.336 U10.6@39.335,14.362 40.212,14.362 40.618,14.768 41.583,14.768 R26.2@42.242,14.109 42.317,14.109 42.59,14.382 42.59,14.522 42.798,14.73 43.876,14.73 44.498,14.108 44.498,12.663 41.242,9.407 41.242,6.392 40.844,5.995 40.793,5.995 J4.1@40.132,5.334
  Bottom Layer w0.254: R25.1@36.629,14.336 v1(37.924,14.336)
485DIR_GPIO: U4.A20 U10.2 U10.3 | length 43.1
  Top Layer w0.381: U4.A20@30.192,45.541 35.003,45.541 v1(35.015,45.553) ; v1(32.015,14.362) U10.3@33.835,14.362 35.155,14.362 35.409,14.616 35.409,15.225 35.003,15.632 U10.2@33.835,15.632
  Bottom Layer w0.381: v1(32.015,14.362) 32.015,17.323 35.015,20.323 v1(35.015,45.553)
AGND: C22.2 C23.2 C24.2 L3.2 L4.2 L5.2 R16.2 U4.A72 U4.A78 U4.A84 | length 33.6
  Top Layer w0.254: v1@31.952,71.141 v1(31.967,71.156) ; C22.2@39.994,67.193 C23.2@41.721,67.193 ; L5.2@41.721,70.647 L5.2@41.721,70.647
  Top Layer w0.381: U4.A72@30.192,66.341 28.527,66.341 28.157,66.711 28.157,69.02 ; U4.A78@30.192,68.741 28.437,68.741 28.157,69.02 ; v1@31.952,71.141 U4.A84@30.192,71.141 28.589,71.141 28.157,70.709 28.157,69.02 ; v1(34.72,70.714) 36.498,70.714 36.564,70.648 38.266,70.648 39.994,70.648 L5.2@41.721,70.647 44.651,70.648 44.963,70.336 44.963,67.505 44.651,67.193 C23.2@41.721,67.193
  Bottom Layer w0.381: v1(31.967,71.156) 31.988,71.156 32.43,70.714 v1(34.72,70.714)
B105: R37.1 U4.B105 | length 36.9
  Top Layer w0.254: R37.1@62.078,110.567 63.119,109.526 63.119,82.504 65.576,80.047 68.916,80.047 69.022,79.941 U4.B105@70.499,79.941
B107: R36.1 U4.B107 | length 36.1
  Top Layer w0.254: R36.1@64.618,110.567 63.627,109.576 63.627,82.714 65.786,80.555 68.836,80.555 69.022,80.741 U4.B107@70.499,80.741
CAN1_RX: R29.1 U4.B113 | length 18.3
  Top Layer w0.381: U4.B113@70.499,83.141 67.97,83.141 67.107,84.005 67.107,88.954 71.777,93.624 71.777,96.656 R29.1@71.781,96.659
CAN1_TX: R31.1 U4.B111 | length 17.4
  Top Layer w0.381: U4.B111@70.499,82.341 72.184,82.341 72.734,82.891 72.734,85.801 75.591,88.658 R31.1@75.591,96.684
CAN_N: J5.2 R28.2 U9.6 | length 11.9
  Top Layer w0.254: v1(74.321,105.371) U9.6@74.321,107.022
  Top Layer w0.381: U9.6@74.321,107.022 74.321,108.087 73.978,108.43 73.978,114.476 J5.2@74.894,115.392
  Bottom Layer w0.254: v1(74.321,105.371) 74.879,104.812 R28.2@74.879,104.202
CAN_P: J5.1 R27.1 U9.7 | length 11.8
  Top Layer w0.254: v1(73.051,105.371) U9.7@73.051,107.022
  Top Layer w0.381: J5.1@72.354,115.392 73.393,114.353 73.393,108.43 73.051,108.087 U9.7@73.051,107.022
  Bottom Layer w0.254: R27.1@73.024,104.202 73.051,104.229 v1(73.051,105.371)
DX0_N: U4.A82 XS3.2 | length 50.5
  Top Layer w0.254: XS3.2@16.279,107.6 16.289,107.61 16.289,108.458 16.498,108.666 17.964,108.666 19.208,107.423 19.208,102.872 33.712,88.367 33.712,71.392 32.464,70.144 31.727,70.144 31.654,70.218 30.315,70.218 U4.A82@30.192,70.341
DX0_P: U4.A80 XS3.1 | length 51.9
  Top Layer w0.254: XS3.1@16.279,110.14 16.289,110.129 16.289,109.281 16.498,109.073 18.132,109.073 19.614,107.591 19.614,103.04 34.119,88.536 34.119,71.224 32.633,69.738 31.727,69.738 31.654,69.664 30.315,69.664 U4.A80@30.192,69.541
ETH_TD0_N: H1.3 U4.B23 | length 75.7
  Top Layer w0.127: U4.B23@70.499,47.141 71.912,47.141 72.173,46.881 72.62,46.881 v1(72.785,47.046)
  Signal03 w0.127: v1(72.785,47.046) 72.95,46.881 76.043,46.881 78.424,44.5 78.424,42.766 78.685,42.505 79.722,42.505 80.146,42.08 80.146,41.507 79.722,41.082 76.962,41.082 76.701,40.821 76.701,40.48 76.962,40.219 79.722,40.219 80.146,39.794 80.146,39.221 79.722,38.796 76.962,38.796 76.701,38.535 76.701,38.194 76.962,37.933 79.722,37.933 80.146,37.508 80.146,36.935 79.722,36.51 76.962,36.51 76.701,36.249 76.701,35.908 76.962,35.647 79.722,35.647 80.146,35.222 80.146,34.649 79.722,34.224 76.962,34.224 76.701,33.963 76.701,33.622 76.962,33.361 79.722,33.361 80.146,32.936 80.146,32.363 79.722,31.938 76.962,31.938 76.701,31.677 76.701,31.336 76.962,31.075 79.722,31.075 80.146,30.65 80.146,30.077 79.722,29.652 76.962,29.652 76.701,29.391 76.701,29.05 76.962,28.789 78.024,28.789 78.424,28.389 78.424,22.163 78.424,21.02 78.576,20.868 78.867,20.868 79.019,20.715 79.019,20.512 78.867,20.36 78.576,20.36 78.424,20.207 78.424,20.004 78.576,19.852 78.867,19.852 79.019,19.699 79.019,19.496 78.867,19.344 78.576,19.344 78.424,19.191 78.424,18.836 78.424,18.582 78.424,17.185 H1.3@79.414,16.194
ETH_TD0_P: H1.2 U4.B21 | length 75.7
  Top Layer w0.127: U4.B21@70.499,46.341 71.912,46.341 72.173,46.601 72.62,46.601 v1(72.785,46.436)
  Signal03 w0.127: v1(72.785,46.436) 72.95,46.601 75.928,46.601 78.144,44.384 78.144,42.65 78.569,42.225 79.606,42.225 79.867,41.964 79.867,41.623 79.606,41.362 76.847,41.362 76.422,40.937 76.422,40.364 76.847,39.939 79.606,39.939 79.867,39.678 79.867,39.337 79.606,39.076 76.847,39.076 76.422,38.651 76.422,38.078 76.847,37.653 79.606,37.653 79.867,37.392 79.867,37.051 79.606,36.79 76.847,36.79 76.422,36.365 76.422,35.792 76.847,35.367 79.606,35.367 79.867,35.106 79.867,34.765 79.606,34.504 76.847,34.504 76.422,34.079 76.422,33.506 76.847,33.081 79.606,33.081 79.867,32.82 79.867,32.479 79.606,32.218 76.847,32.218 76.422,31.793 76.422,31.22 76.847,30.795 79.606,30.795 79.867,30.534 79.867,30.193 79.606,29.932 76.847,29.932 76.422,29.507 76.422,28.934 76.847,28.509 77.909,28.509 78.144,28.274 H1.2@78.144,13.654
ETH_TD1_N: H1.7 U4.B29 | length 75.7
  Top Layer w0.127: v1(68.01,49.446) 68.175,49.281 68.825,49.281 69.086,49.541 U4.B29@70.499,49.541
  Signal03 w0.127: v1(68.01,49.446) 67.845,49.281 66.776,49.281 66.003,48.507 66.003,6.249 67.736,4.516 67.818,4.434 79.987,4.434 84.469,8.916 84.469,16.169 H1.7@84.494,16.194
ETH_TD1_P: H1.4 U4.B27 | length 75.7
  Top Layer w0.127: v1(68.01,48.836) 68.175,49.001 68.825,49.001 69.086,48.741 U4.B27@70.499,48.741
  Signal03 w0.127: v1(68.01,48.836) 67.845,49.001 66.892,49.001 66.283,48.392 66.283,6.364 67.934,4.713 79.872,4.713 84.19,9.031 84.19,10.149 83.936,10.403 83.864,10.475 83.648,10.475 83.488,10.314 83.272,10.314 83.128,10.458 83.128,10.673 83.397,10.942 83.665,11.21 83.665,11.426 83.521,11.569 83.306,11.569 83.038,11.301 82.769,11.033 82.554,11.033 82.41,11.176 82.41,11.392 82.571,11.552 82.571,11.768 81.624,12.714 H1.4@80.684,13.654
ETH_TD2_N: H1.6 U4.B35 | length 75.7
  Top Layer w0.127: U4.B35@70.499,51.941 71.912,51.941 72.173,51.681 72.785,51.681 72.81,51.706 v1(72.81,51.846)
  Signal03 w0.127: v1(72.81,51.846) 72.976,51.681 81.175,51.681 83.224,49.631 83.224,47.389 83.409,47.204 83.758,47.204 84.106,46.855 84.106,46.384 83.758,46.035 82.528,46.035 82.343,45.851 82.343,45.611 82.528,45.426 83.758,45.426 84.106,45.077 84.106,44.606 83.758,44.257 82.528,44.257 82.343,44.073 82.343,43.833 82.528,43.648 83.758,43.648 84.106,43.299 84.106,42.828 83.758,42.479 82.528,42.479 82.343,42.295 82.343,42.055 82.528,41.87 83.758,41.87 84.106,41.521 84.106,41.05 83.758,40.701 82.528,40.701 82.343,40.517 82.343,40.277 82.528,40.092 83.758,40.092 84.106,39.743 84.106,39.272 83.758,38.923 82.528,38.923 82.343,38.739 82.343,38.499 82.528,38.314 83.758,38.314 84.106,37.965 84.106,37.494 83.758,37.145 82.528,37.145 82.343,36.961 82.343,36.721 82.528,36.536 83.758,36.536 84.106,36.187 84.106,35.716 83.758,35.367 82.528,35.367 82.343,35.183 82.343,34.943 82.528,34.758 83.758,34.758 84.106,34.409 84.106,33.938 83.758,33.589 82.528,33.589 82.343,33.405 82.343,33.165 82.528,32.98 83.758,32.98 84.106,32.631 84.106,32.16 83.758,31.811 82.528,31.811 82.343,31.627 82.343,31.387 82.528,31.202 82.876,31.202 83.224,30.853 H1.6@83.224,13.654
ETH_TD2_P: H1.5 U4.B33 | length 75.7
  Top Layer w0.127: U4.B33@70.499,51.141 71.912,51.141 72.173,51.401 72.785,51.401 72.81,51.376 v1(72.81,51.236)
  Signal03 w0.127: v1(72.81,51.236) 72.976,51.401 81.059,51.401 82.945,49.515 82.945,47.273 83.294,46.924 83.642,46.924 83.827,46.74 83.827,46.5 83.642,46.315 82.412,46.315 82.063,45.966 82.063,45.495 82.412,45.146 83.642,45.146 83.827,44.962 83.827,44.722 83.642,44.537 82.412,44.537 82.063,44.188 82.063,43.717 82.412,43.368 83.642,43.368 83.827,43.184 83.827,42.944 83.642,42.759 82.412,42.759 82.063,42.41 82.063,41.939 82.412,41.59 83.642,41.59 83.827,41.406 83.827,41.166 83.642,40.981 82.412,40.981 82.063,40.632 82.063,40.161 82.412,39.812 83.642,39.812 83.827,39.628 83.827,39.388 83.642,39.203 82.412,39.203 82.063,38.854 82.063,38.383 82.412,38.034 83.642,38.034 83.827,37.85 83.827,37.61 83.642,37.425 82.412,37.425 82.063,37.076 82.063,36.605 82.412,36.256 83.642,36.256 83.827,36.072 83.827,35.832 83.642,35.647 82.412,35.647 82.063,35.298 82.063,34.827 82.412,34.478 83.642,34.478 83.827,34.294 83.827,34.054 83.642,33.869 82.412,33.869 82.063,33.52 82.063,33.049 82.412,32.7 83.642,32.7 83.827,32.516 83.827,32.276 83.642,32.091 82.412,32.091 82.063,31.742 82.063,31.271 82.412,30.922 82.76,30.922 82.945,30.738 82.945,21.35 82.793,21.198 82.487,21.198 82.334,21.046 82.334,20.842 82.487,20.69 82.793,20.69 82.945,20.538 82.945,20.334 82.793,20.182 82.487,20.182 82.334,20.03 82.334,19.826 82.487,19.674 82.793,19.674 82.945,19.522 82.945,19.318 82.793,19.166 82.487,19.166 82.334,19.014 82.334,18.81 82.487,18.658 82.793,18.658 82.945,18.506 82.945,18.404 82.945,17.185 H1.5@81.954,16.194
ETH_TD3_N: H1.9 U4.B41 | length 75.7
  Top Layer w0.127: U4.B41@70.499,54.341 71.912,54.341 72.173,54.081 72.645,54.081 v1(72.81,54.246)
  Signal03 w0.127: v1(72.81,54.246) 72.976,54.081 83.169,54.081 86.171,51.079 86.171,48.811 86.47,48.512 86.847,48.512 87.31,48.049 87.31,47.425 86.847,46.962 85.331,46.962 85.032,46.663 85.032,46.271 85.331,45.972 86.847,45.972 87.31,45.509 87.31,44.885 86.847,44.422 85.331,44.422 85.032,44.123 85.032,43.731 85.331,43.432 86.847,43.432 87.31,42.969 87.31,42.345 86.847,41.882 85.331,41.882 85.032,41.583 85.032,41.191 85.331,40.892 86.847,40.892 87.31,40.429 87.31,39.805 86.847,39.342 85.331,39.342 85.032,39.043 85.032,38.651 85.331,38.352 86.847,38.352 87.31,37.889 87.31,37.265 86.847,36.802 85.331,36.802 85.032,36.503 85.032,36.111 85.331,35.812 86.847,35.812 87.31,35.349 87.31,34.725 86.847,34.262 85.331,34.262 85.032,33.963 85.032,33.571 85.331,33.272 85.708,33.272 86.171,32.809 86.171,20.538 86.171,20.385 86.323,20.233 86.629,20.233 86.782,20.08 86.782,19.877 86.629,19.725 86.323,19.725 86.171,19.572 86.171,19.369 86.323,19.217 86.629,19.217 86.782,19.064 86.782,18.861 86.629,18.709 86.323,18.709 86.171,18.556 86.171,18.201 86.171,17.947 86.171,17.058 H1.9@87.034,16.194
ETH_TD3_P: H1.8 U4.B39 | length 75.7
  Top Layer w0.127: U4.B39@70.499,53.541 71.912,53.541 72.173,53.801 72.645,53.801 v1(72.81,53.636)
  Signal03 w0.127: v1(72.81,53.636) 72.976,53.801 83.053,53.801 85.891,50.963 85.891,48.695 86.354,48.232 86.732,48.232 87.031,47.933 87.031,47.541 86.732,47.242 85.215,47.242 84.752,46.779 84.752,46.155 85.215,45.692 86.732,45.692 87.031,45.393 87.031,45.001 86.732,44.702 85.215,44.702 84.752,44.239 84.752,43.615 85.215,43.152 86.732,43.152 87.031,42.853 87.031,42.461 86.732,42.162 85.215,42.162 84.752,41.699 84.752,41.075 85.215,40.612 86.732,40.612 87.031,40.313 87.031,39.921 86.732,39.622 85.215,39.622 84.752,39.159 84.752,38.535 85.215,38.072 86.732,38.072 87.031,37.773 87.031,37.381 86.732,37.082 85.215,37.082 84.752,36.619 84.752,35.995 85.215,35.532 86.732,35.532 87.031,35.233 87.031,34.841 86.732,34.542 85.215,34.542 84.752,34.079 84.752,33.455 85.215,32.992 85.592,32.992 85.891,32.693 85.891,13.781 H1.8@85.764,13.654